# EAGLE board button (EAGLE 6.5.0)
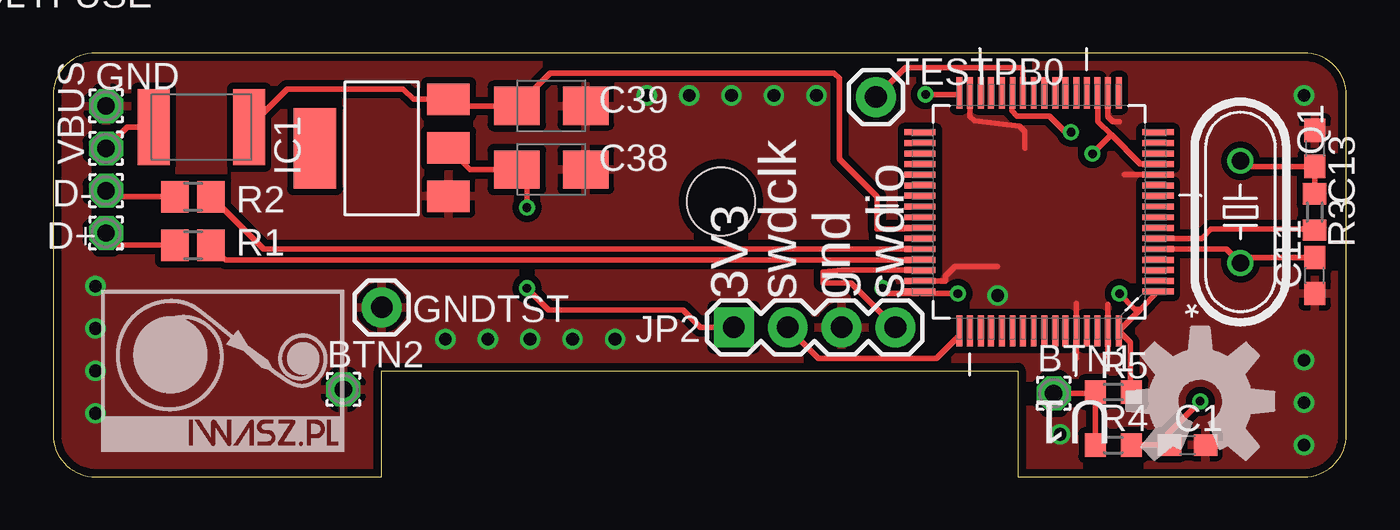
[diagram p0: board, top side]
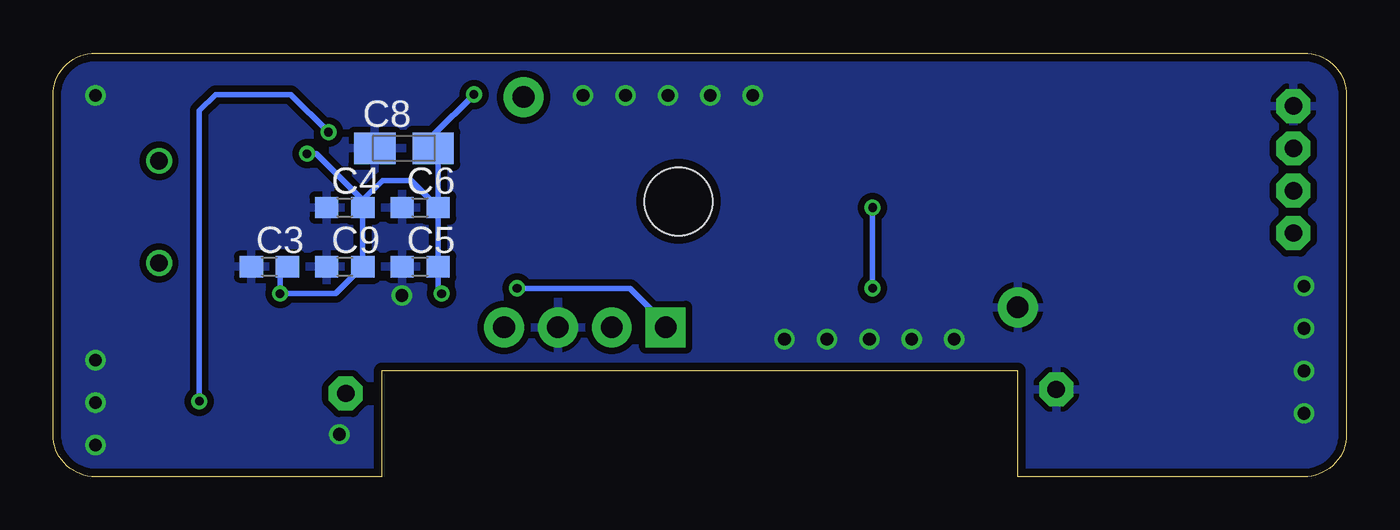
[diagram p1: board, bottom side, seen from below]

Size 61 x 20 mm. Coordinates in mm from the lower left corner, seen from the top.
Outline: 0,18 0,2 arc90 2,0 15.5,0 15.5,5 45.5,5 45.5,0 59,0 arc90 61,2 61,18 arc90 59,20 2,20 arc90 0,18
Copper layers (1*16): Top 0.0356mm / dielectric 1.5011mm / Bottom 0.0356mm
Design rules "LaenPCBOrder": minimum track width 6mil, minimum drill 13mil, track to track 6mil, track to pad 6mil, pad to pad 6mil, via to via 6mil, smd to smd 6mil, copper to edge 15mil, drill to drill 6mil, minimum pad ring 7mil, minimum via ring 7mil, stop-mask expansion 4mil, vias tented up to drill 0mil, thermal gap 10mil
Holes 3.2 mm at 31.5,13

## Footprints (pad centres in the part's own frame; a part is rotated, then mirrored left to right if it is on the bottom)
1,6/0,8 = drill 0.813 pad 1.6 octagon: 1 0,0
C0603 = smd 1.1 x 1: 1 -0.85,0; 2 0.85,0
A/3216-18R = smd 1.95 x 1.5: + 1.375,0; - -1.375,0
B/3528-21W = smd 2.15 x 1.8: + 1.625,0; - -1.625,0
1X01 = drill 1.016 pad 1.88: 1 0,0
SOT223 = smd 1.499 x 2.007: 1 -2.261,-3.15; 2 0.025,-3.15; 3 2.311,-3.15 | smd 3.81 x 2.007: 4 0,3.15
1X04 = drill 1.016 pad 1.88 square: 1 0,0 | drill 1.016 pad 1.88: 2 2.54,0; 3 5.08,0; 4 7.62,0
CT/CN1812 = smd 1.5 x 3.6: 1 -2.25,0; 2 2.25,0
HC49/S = drill 0.813: 1 -2.413,0; 2 2.413,0
R0805 = smd 1.3 x 1.5: 1 -0.85,0; 2 0.85,0
R0603 = smd 1 x 1.1: 1 -0.85,0; 2 0.85,0
QFP50P1200X1200X160-64N = smd 1.473 x 0.279: 1 -5.613,3.759; 2 -5.613,3.251; 3 -5.613,2.743; 4 -5.613,2.261; 5 -5.613,1.753; 6 -5.613,1.245; 7 -5.613,0.762; 8 -5.613,0.254; 9 -5.613,-0.254; 10 -5.613,-0.762; 11 -5.613,-1.245; 12 -5.613,-1.753; 13 -5.613,-2.261; 14 -5.613,-2.743; 15 -5.613,-3.251; 16 -5.613,-3.759; 33 5.613,-3.759; 34 5.613,-3.251; 35 5.613,-2.743; 36 5.613,-2.261; 37 5.613,-1.753; 38 5.613,-1.245; 39 5.613,-0.762; 40 5.613,-0.254; 41 5.613,0.254; 42 5.613,0.762; 43 5.613,1.245; 44 5.613,1.753; 45 5.613,2.261; 46 5.613,2.743; 47 5.613,3.251; 48 5.613,3.759 | smd 0.279 x 1.473: 17 -3.759,-5.613; 18 -3.251,-5.613; 19 -2.743,-5.613; 20 -2.261,-5.613; 21 -1.753,-5.613; 22 -1.245,-5.613; 23 -0.762,-5.613; 24 -0.254,-5.613; 25 0.254,-5.613; 26 0.762,-5.613; 27 1.245,-5.613; 28 1.753,-5.613; 29 2.261,-5.613; 30 2.743,-5.613; 31 3.251,-5.613; 32 3.759,-5.613; 49 3.759,5.613; 50 3.251,5.613; 51 2.743,5.613; 52 2.261,5.613; 53 1.753,5.613; 54 1.245,5.613; 55 0.762,5.613; 56 0.254,5.613; 57 -0.254,5.613; 58 -0.762,5.613; 59 -1.245,5.613; 60 -1.753,5.613; 61 -2.261,5.613; 62 -2.743,5.613; 63 -3.251,5.613; 64 -3.759,5.613

## Placement (x,y rotation side)
BTN1  [1,6/0,8]  47.19,3.94 0 top
BTN2  [1,6/0,8]  13.69,4.13 0 top
C1  100nF  [C0603]  53.5,1.5 0 top
C3  100nF  [C0603]  50.8,9.91 0 bottom
C4  100nF  [C0603]  47.24,12.71 0 bottom
C5  100nF  [C0603]  43.69,9.91 0 bottom
C6  100nF  [C0603]  43.69,12.71 0 bottom
C8  4.7µF  [A/3216-18R]  44.45,15.5 0 bottom
C9  100nF  [C0603]  47.24,9.91 0 bottom
C11  30pF  [C0603]  59.5,9.5 90 top
C13  30pF  [C0603]  59.5,15.5 270 top
C38  22µF  [B/3528-21W]  23.5,14.5 180 top
C39  10µF  [B/3528-21W]  23.5,17.5 180 top
D+  [1,6/0,8]  2.5,11.5 0 top
D-  [1,6/0,8]  2.5,13.5 0 top
GND  [1,6/0,8]  2.5,17.5 0 top
GNDTST  M01PTH  [1X01]  15.5,8 0 top
IC1  REG1117  [SOT223]  15.5,15.5 90 top
JP2  0  [1X04]  32.11,7.06 0 top
POLYFUSE  VARISTORCN1812  [CT/CN1812]  7,16.5 180 top
Q1  RTC  [HC49/S]  56,12.5 270 top
R1  22  [R0805]  6.6,10.93 0 top
R2  22  [R0805]  6.6,13.22 0 top
R3  220  [R0603]  59.5,12.5 270 top
R4  220  [R0603]  50,1.5 0 top
R5  220  [R0603]  50,4 0 top
TESTPB0  M01PTH  [1X01]  38.81,17.92 0 top
U1  STM32F105RBT6  [QFP50P1200X1200X160-64N]  46.5,12.5 180 top
U$1  [LOGO-TINY]  8,5 0 top
U$4  [OSHW-LOGO-L]  54.1,3.56 0 top
VBUS  [1,6/0,8]  2.5,15.5 0 top

## Library data of the parts
BTN1 BTN2 D+ D- GND VBUS = wirepad
C1 C3-C6 C8 C9 C11 C13 C38 C39 R3-R5 = rcl
GNDTST JP2 TESTPB0 = SparkFun-Connectors
IC1 = burr-brown; MPN: REG1117; OC_FARNELL: 1097566; OC_NEWARK: 14P6981
POLYFUSE = varistor
Q1 = crystal; OC_FARNELL: 1667008; OC_NEWARK: unknown
R1 R2 = resistor
U1 = iwasz-logo; MPN: STM32F105RBT6; OC_FARNELL: 1737133; OC_NEWARK: 25R9437; PACKAGE: LQFP-64; SUPPLIER: STMicroelectronics
U$1 = iwasz-logo
U$4 = SparkFun-Aesthetics

## Nets
+3V3: C3.2 C4.2 C5.2 C6.2 C8.+ C9.2 C38.+ IC1.2 JP2.1 R5.2 U1.1 U1.13 U1.19 U1.32 U1.48 U1.64
+5V: C39.+ IC1.3 POLYFUSE.1 U1.42
BTN: C1.1 R4.2 U1.27
D+: R1.2 U1.45
D-: R2.2 U1.44
GND: BTN2.1 C1.2 C3.1 C4.1 C5.1 C6.1 C8.- C9.1 C11.1 C13.1 C38.- C39.- GND.1 GNDTST.1 IC1.1 JP2.3 U1.12 U1.18 U1.31 U1.47 U1.60 U1.63
N$1: C13.2 Q1.1 R3.1
N$2: BTN1.1 R4.1 R5.1
N$6: D+.1 R1.1
N$7: D-.1 R2.1
N$10: POLYFUSE.2 VBUS.1
OSC_IN: C11.2 Q1.2 U1.5
OSC_OUT: R3.2 U1.6
SWDCLK: JP2.2 U1.49
SWDIO: JP2.4 U1.46
TEST1: TESTPB0.1 U1.26
USART2_RX: U1.17
USART2_TX: U1.16

## Tracks (layer width: path | path; a pad name or v marks a point on that pad's centre or on a via)
+3V3  (via drill 0.41)
  Top 0.254: IC1.2 19.68,14.5 C38.+ 22.35,14.02 v22.35,12.71 | U1.19 49.28,18.08 49.28,16.77 49.91,16.14 | 49.91,16.14 51.29,14.76 U1.13 | U1.32 42.67,18.04 v41.15,18.04 | 51.28,7.91 U1.64 50.8,6.35 50.8,4 R5.2 | 51.28,7.91 U1.1 | v50.29,8.64 51.03,7.91 51.28,7.91 | v49.02,15.25 49.91,16.14 | v42.67,8.64 40.98,8.64 U1.48 40.79,8.64 39.37,8.64 v39.12,8.9 | v22.35,8.9 23.37,7.88 29.72,7.88 30.54,7.06 JP2.1
  Bottom 0.254: C6.2 42.84,15.27 C8.+ 43.08,16.11 v41.15,18.04 | C6.2 C5.2 42.84,8.81 v42.67,8.64 | C3.2 50.29,9.57 v50.29,8.64 47.66,8.64 C9.2 C4.2 46.39,13.05 | C6.2 44.11,13.98 45.47,13.98 46.39,13.05 | 46.39,13.05 48.59,15.25 v49.02,15.25 | v22.35,12.71 v22.35,8.9 | v39.12,8.9 33.78,8.9 32.11,7.22 JP2.1
+5V
  Top 0.254: POLYFUSE.1 11.05,18.3 16.51,18.3 17,17.81 IC1.3 18.96,17.5 C39.+ 23.43,19.06 36.83,19.06 37.08,18.8 37.08,14.99 38.86,13.22 38.86,11.69 40.13,11.69 40.18,11.74 U1.42
BTN  (via drill 0.41)
  Top 0.254: C1.1 R4.2 52.55,1.5 52.58,1.53 52.58,2.04 v54.1,3.56 | v48.01,16.26 47.75,16.26 46.99,17.03 45.47,17.03 45.21,17.28 45.21,18.07 U1.27
  Bottom 0.254: v54.1,3.56 54.1,17.28 53.34,18.04 49.78,18.04 v48.01,16.26
D+
  Top 0.254: R1.2 8.14,10.24 U1.45
D-
  Top 0.254: R2.2 9.92,10.75 U1.44
GND  (via drill 0.6)
  Top 0.254: U1.31 | U1.31 43.25,17 43.44,16.81 45.58,16.56 45.83,16.3 C8.- | U1.18 49.75,17 49.98,16.77 50.29,16.77 | U1.12 50.53,14.25 | 49.75,8.14 U1.63 49.75,5.68 | 48.25,8.18 U1.60 48.25,5.58 | U1.47 40.87,9.26 | U1.47 | U1.47 42.08,9.25 42.09,9.26 42.09,9.48 42.53,9.91 C5.1
  other vias: 18.5,6.49 20.5,6.49 22.5,6.49 24.5,6.49 26.5,6.49 28,18 30,18 32,18 34,18 36,18 59,18 59,5.5 59,3.5 59,1.5 47.5,2 2,9 2,7 2,5 2,3 44.54,8.56
  pour Bottom (isolate 0.305): -1,21 -2,21 -2,-1.5 63,-1.5 63,21
  pour Top (isolate 0.305): 0,21.5 -1.5,21.5 -1.5,-1.5 62.5,-1.5 62.5,21.5
N$1
  Top 0.254: Q1.1 56.26,14.65 C13.2 R3.1
N$2
  Top 0.254: BTN1.1 49.15,3.94 R5.1 R4.1
N$6
  Top 0.254: D+.1 3.07,10.93 R1.1
N$7
  Top 0.254: D-.1 2.78,13.22 R2.1
N$10
  Top 0.254: VBUS.1 3.5,16.5 POLYFUSE.2
OSC_IN
  Top 0.254: C11.2 56.26,10.35 Q1.2 55.34,10.75 U1.5
OSC_OUT
  Top 0.254: R3.2 59.46,11.69 54.61,11.69 54.17,11.26 U1.6
SWDCLK
  Top 0.254: JP2.2 36.11,5.6 41.66,5.6 42.74,6.68 U1.49
SWDIO
  Top 0.254: JP2.4 37.63,9.15 36.32,9.15 36.32,9.66 37.24,9.76 U1.46
TEST1
  Top 0.254: TESTPB0.1 40.2,19.31 45.72,19.31 45.74,19.29 U1.26

## Text on the board
tNames: 3V3 | swdclk | gnd | swdio